# Altium PCB 電源分接.PcbDoc
Units mil, origin at the board's own origin, x right, y up, seen from the top; angles counter-clockwise.
Board outline 6000 x 4000 mil, 2 copper layers (Top Layer, Bottom Layer); 3 components, 2 nets, 22 pads, 0 vias.
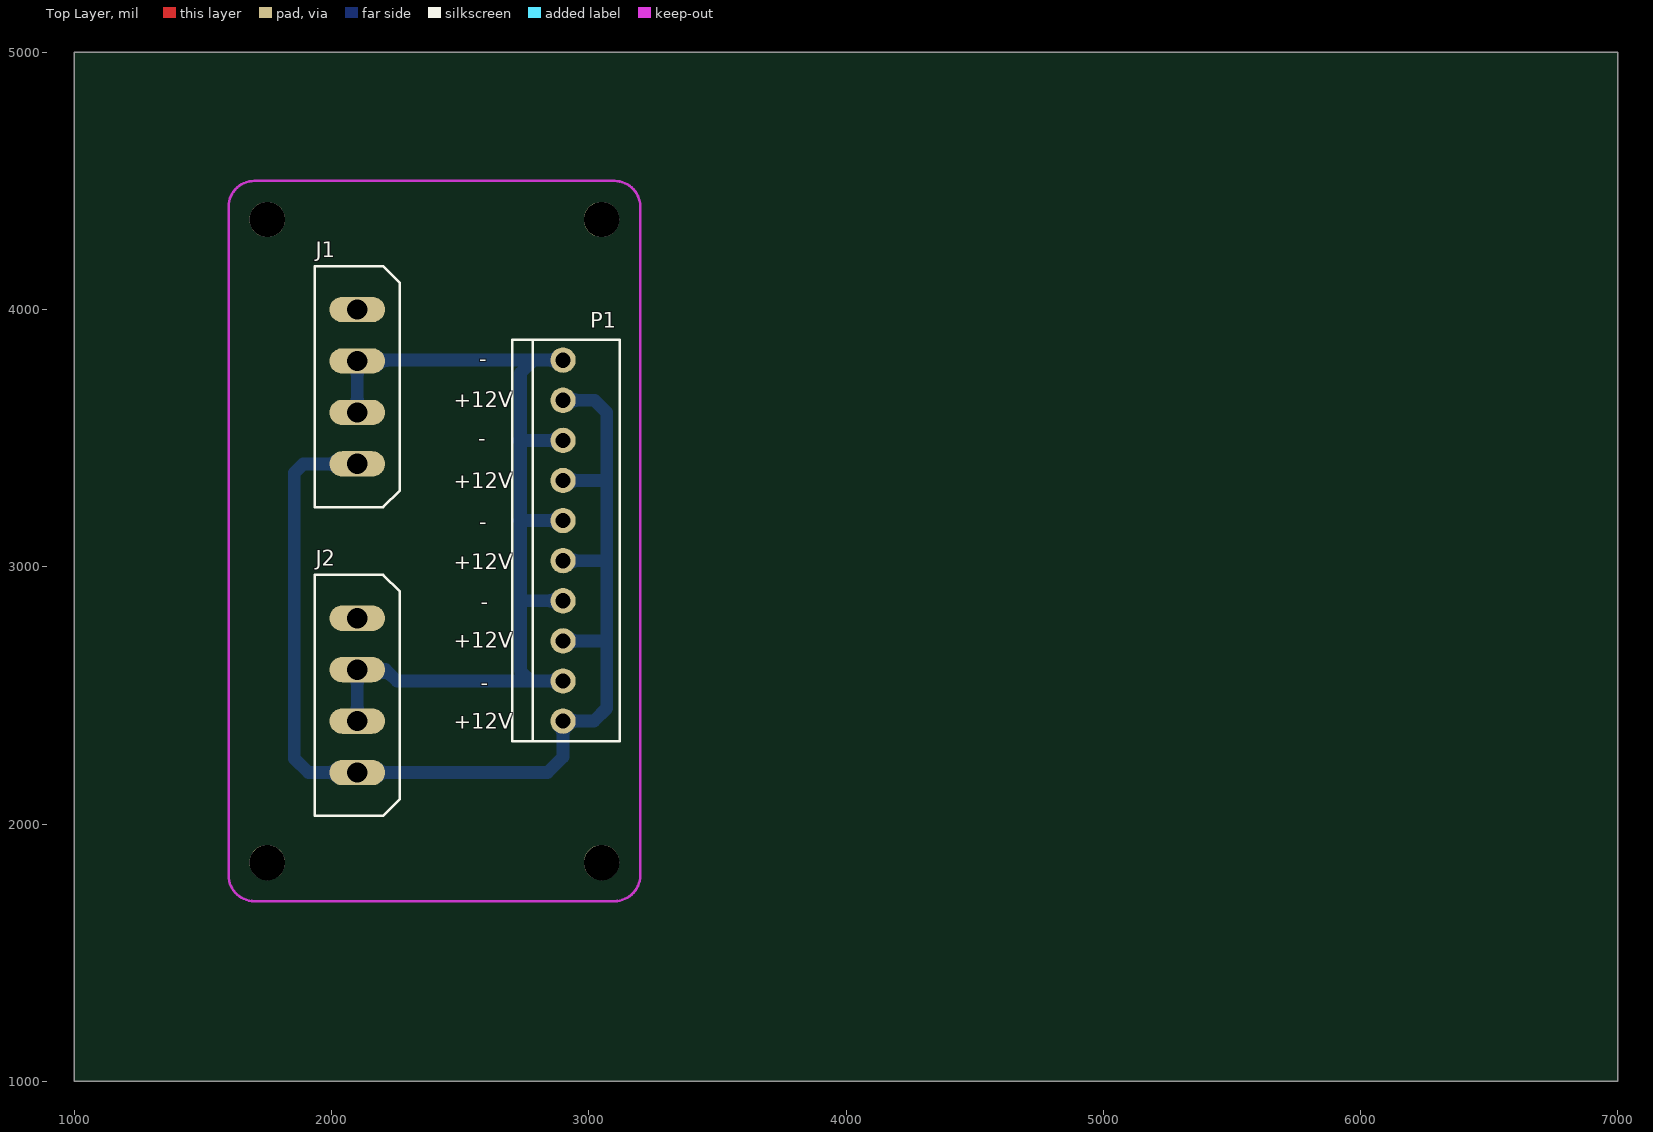
[diagram p0: Top Layer view]
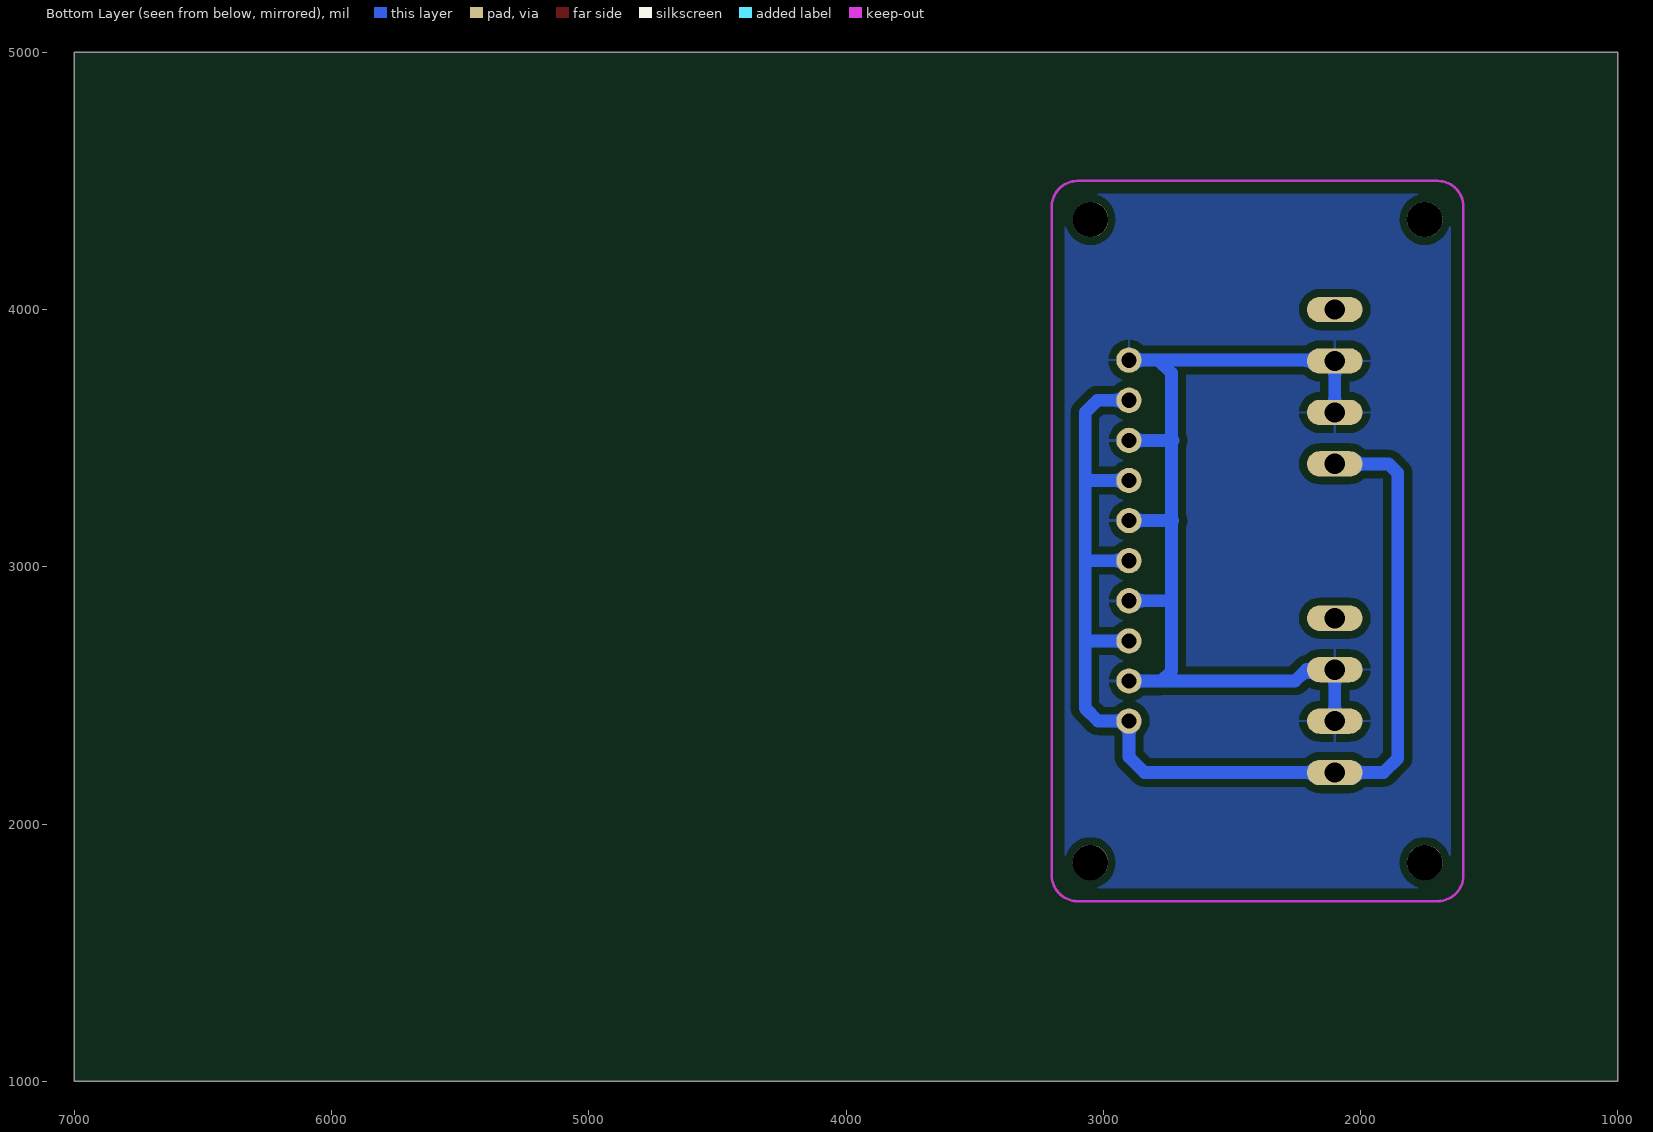
[diagram p1: Bottom Layer view, seen from below]

## Layer stack, top to bottom
Top Layer: signal copper 1.4
Dielectric: dielectric 12.6, FR-4, Dk 4.8
Bottom Layer: signal copper 1.4

## Board outline
1000,1000 7000,1000 7000,5000 1000,5000

## Design rules (kind name [scope] priority, off if disabled: settings)
Clearance [All] p1: gap=10
ComponentClearance [All] p1: gap=10 collisioncheckmode=0
HoleSize [All] p1: absolutevalues=TRUE maxlimit=150 minlimit=1 maxpercent=80.000 minpercent=20.000
PolygonConnect [All] p1: connectstyle=Relief reliefconductorwidth=10 reliefentries=4 polygonreliefangle="90 Angle"
RoutingVias [All] p1: holewidth=28 width=50 viastyle="Through Hole" minholewidth=28 minwidth=50 maxholewidth=28 maxwidth=50
SolderMaskExpansion [All] p1: expansion=4
TestPointUsage [All] p1: valid=0 allowmultiple=FALSE
Testpoint [All] p1: side=15 testpointundercomponent=TRUE minsize=40 maxsize=100 preferedsize=60 minholesize=0 maxholesize=40 preferedholesize=32 testpointgrid=1 style=1023 order=-539222988
Width [All] p1: maxlimit=50 minlimit=10 preferedwidth=50
16 further rules are at their usual default settings.

## Components (designator, comment, footprint, x,y, rotation, side; value= is the part's Value field where it differs from the comment)
J1 "9090-4V" 9090-4V 2100,4000 r0 top
J2 "9090-4V" 9090-4V 2100,2800 r0 top
P1 "Header 10" "10pin 3.96mm" 2900,2400 r90 top

## Footprints (in the part's own frame and the unit in brackets; to place one, negate y for a bottom-side part, rotate by r counter-clockwise, add the part's x,y. Pads: shape width x height; smd on the part's side, far side on the other; paste and mask are expansions set on the pad)
"10pin 3.96mm" [mm]
  round 2.5 hole 1.5: 1(0,0) 2(3.96,0) 3(7.92,0) 4(11.88,0) 5(15.84,0) 6(19.8,0) 7(23.76,0) 8(27.72,0) 9(31.68,0) 10(35.64,0)
  silkscreen extent -2,-5.6 37.64,5
9090-4V [mm]
  oval 5.5x2.5 hole 2: 1(0,0) 2(0,-5.08) 3(0,-10.16) 4(0,-15.24)
  silkscreen extent -4.2,-19.52 4.2,4.28

## Part data
P1: "Header, 10-Pin"

## Free pads (board coordinates)
  round 137.8 hole 137.8: 0(1750,4350) 1(1750,1850) 2(3050,1850) 3(3050,4350)

## Nets (pads, with @x,y where several pads share a name; then routed paths per layer and width w, separated by ;. In a path a pad name is that pad's centre, name@x,y a point inside that pad or via, vN(x,y) a via of type N, cw(c..) or ccw(c..) an arc to the next point about the centre after c; other vN are vias at no path point)
+12: J1.4 J2.4 P1.1 P1.3 P1.5 P1.7 P1.9 | length 5465.2
  Bottom Layer w50: J2.4@2023.82,2182.88 ccw(c1982.49,2141.55) 1982.49,2200 ccw(c1982.49,2258.45) J2.4@2023.82,2217.12 ; J1.4@2023.82,3382.88 ccw(c1982.49,3341.55) 1982.49,3400 ccw(c1982.49,3458.45) J1.4@2023.82,3417.12 ; J1.4 1890,3400 1855,3365 1855,2255 1910,2200 2840,2200 2900,2260 P1.1 3020,2400 3070,2450 3070,3600 3022.76,3647.24 P1.9 ; J2.4@2176.18,2182.88 cw(c2217.51,2141.55) 2217.51,2200 cw(c2217.51,2258.45) J2.4@2176.18,2217.12 ; P1.1@2882.88,2382.88 cw(c2841.55,2341.55) 2900,2341.55 cw(c2958.45,2341.55) 2917.12,2382.88 cw(c2958.45,2341.55) 2958.45,2400 cw(c2958.45,2458.45) P1.1@2917.12,2417.12 ; P1.3 3068.19,2711.81 ; P1.5 3068.62,3023.62 ; P1.7 3069.57,3335.43 ; P1.3@2917.12,2694.69 cw(c2958.45,2653.36) 2958.45,2711.81 cw(c2958.45,2770.27) P1.3@2917.12,2728.93 ; P1.5@2917.12,3006.5 cw(c2958.45,2965.17) 2958.45,3023.62 cw(c2958.45,3082.08) P1.5@2917.12,3040.74 ; P1.7@2917.12,3318.31 cw(c2958.45,3276.98) 2958.45,3335.43 cw(c2958.45,3393.89) P1.7@2917.12,3352.55 ; P1.9@2917.12,3630.12 cw(c2958.45,3588.79) 2958.45,3647.24 cw(c2958.45,3705.7) P1.9@2917.12,3664.36
GND: J1.2 J1.3 J2.2 J2.3 P1.2 P1.4 P1.6 P1.8 P1.10 | length 4872.8
  Bottom Layer w50: J2.3@2082.88,2417.12 ccw(c2041.55,2458.45) 2100,2458.45 ccw(c2158.45,2458.45) J2.3@2117.12,2417.12 ; J2.2@2082.88,2582.88 cw(c2041.55,2541.55) 2100,2541.55 cw(c2158.45,2541.55) J2.2@2117.12,2582.88 ; J1.3@2082.88,3617.12 ccw(c2041.55,3658.45) 2100,3658.45 ccw(c2158.45,3658.45) J1.3@2117.12,3617.12 ; J1.2@2082.88,3782.88 cw(c2041.55,3741.55) 2100,3741.55 cw(c2158.45,3741.55) J1.2@2117.12,3782.88 ; J2.3 J2.2 ; J1.3 J1.2 2103.15,3803.15 P1.10 ; J2.2@2103.15,2603.15 J2.2 ; J2.2@2172.87,2580.12 cw(c2200.83,2539.89) 2235.47,2574.53 ; J1.2@2176.18,3782.88 cw(c2225.11,3733.94) 2225.11,3803.15 ; J1.2@2176.18,3817.12 ccw(c2209.91,3850.85) 2209.91,3803.15 ; J2.2@2177.83,2584.71 cw(c2210,2558.52) 2210,2600 ; J2.2@2177.83,2615.29 ccw(c2210,2641.48) 2210,2600 ; 2728.66,3491.34 P1.8 ; 2729.53,3179.53 P1.6 ; 2737.28,2867.72 P1.4 ; 2774.09,2555.91 2735,2595 2735,3753.15 2785,3803.15 ; P1.2@2882.88,2538.78 ccw(c2841.55,2497.45) 2841.55,2555.91 ccw(c2841.55,2614.36) P1.2@2882.88,2573.03 ; P1.4@2882.88,2850.6 ccw(c2841.55,2809.26) 2841.55,2867.72 ccw(c2841.55,2926.17) P1.4@2882.88,2884.84 ; P1.6@2882.88,3162.41 ccw(c2841.55,3121.07) 2841.55,3179.53 ccw(c2841.55,3237.98) P1.6@2882.88,3196.65 ; P1.8@2882.88,3474.22 ccw(c2841.55,3432.88) 2841.55,3491.34 ccw(c2841.55,3549.79) P1.8@2882.88,3508.46 ; P1.10@2882.88,3786.03 ccw(c2841.55,3744.7) 2841.55,3803.15 ccw(c2841.55,3861.6) P1.10@2882.88,3820.27 ; P1.2 2254.09,2555.91 2210,2600 ; J2.2 2210,2600
pads on no net: J1.1 J2.1

## Polygon pours and split planes (outlines as drawn)
GND on Bottom Layer (solid, remove dead copper): 1700,4450 1650,4400 1650,1800 1700,1750 3100,1750 3150,1800 3150,4400 3100,4450

## Keep-outs
Keep-Out Layer:
  lines w10: 1600,1800 ccw(c1700,1800) 1700,1700 3100,1700 ccw(c3100,1800) 3200,1800 3200,4400 ccw(c3100,4400) 3100,4500 1700,4500 ccw(c1700,4400) 1600,4400 1600,1800

## Silkscreen, mask and mechanical layers (free items; w line width, h text height)
Top Overlay:
  text "-" at 2575,3780 h59.05
  text "+12V" at 2475,3620 h59.05
  text "-" at 2570,3470 h59.05
  text "+12V" at 2475,3305 h59.05
  text "-" at 2575,3145 h59.05
  text "+12V" at 2475,2990 h59.05
  text "-" at 2580,2835 h59.05
  text "+12V" at 2475,2685 h59.05
  text "-" at 2580,2520 h59.05
  text "+12V" at 2475,2370 h59.05